# Altium PCB Camera_PCB.PcbDoc
Units mm, origin at the board's own origin, x right, y up, seen from the top; angles counter-clockwise.
Board outline 85 x 80 mm, 4 copper layers (Signal1, Power, Ground, Signal2), stack 1.782 mm thick; 120 components, 92 nets, 356 pads, 79 vias.
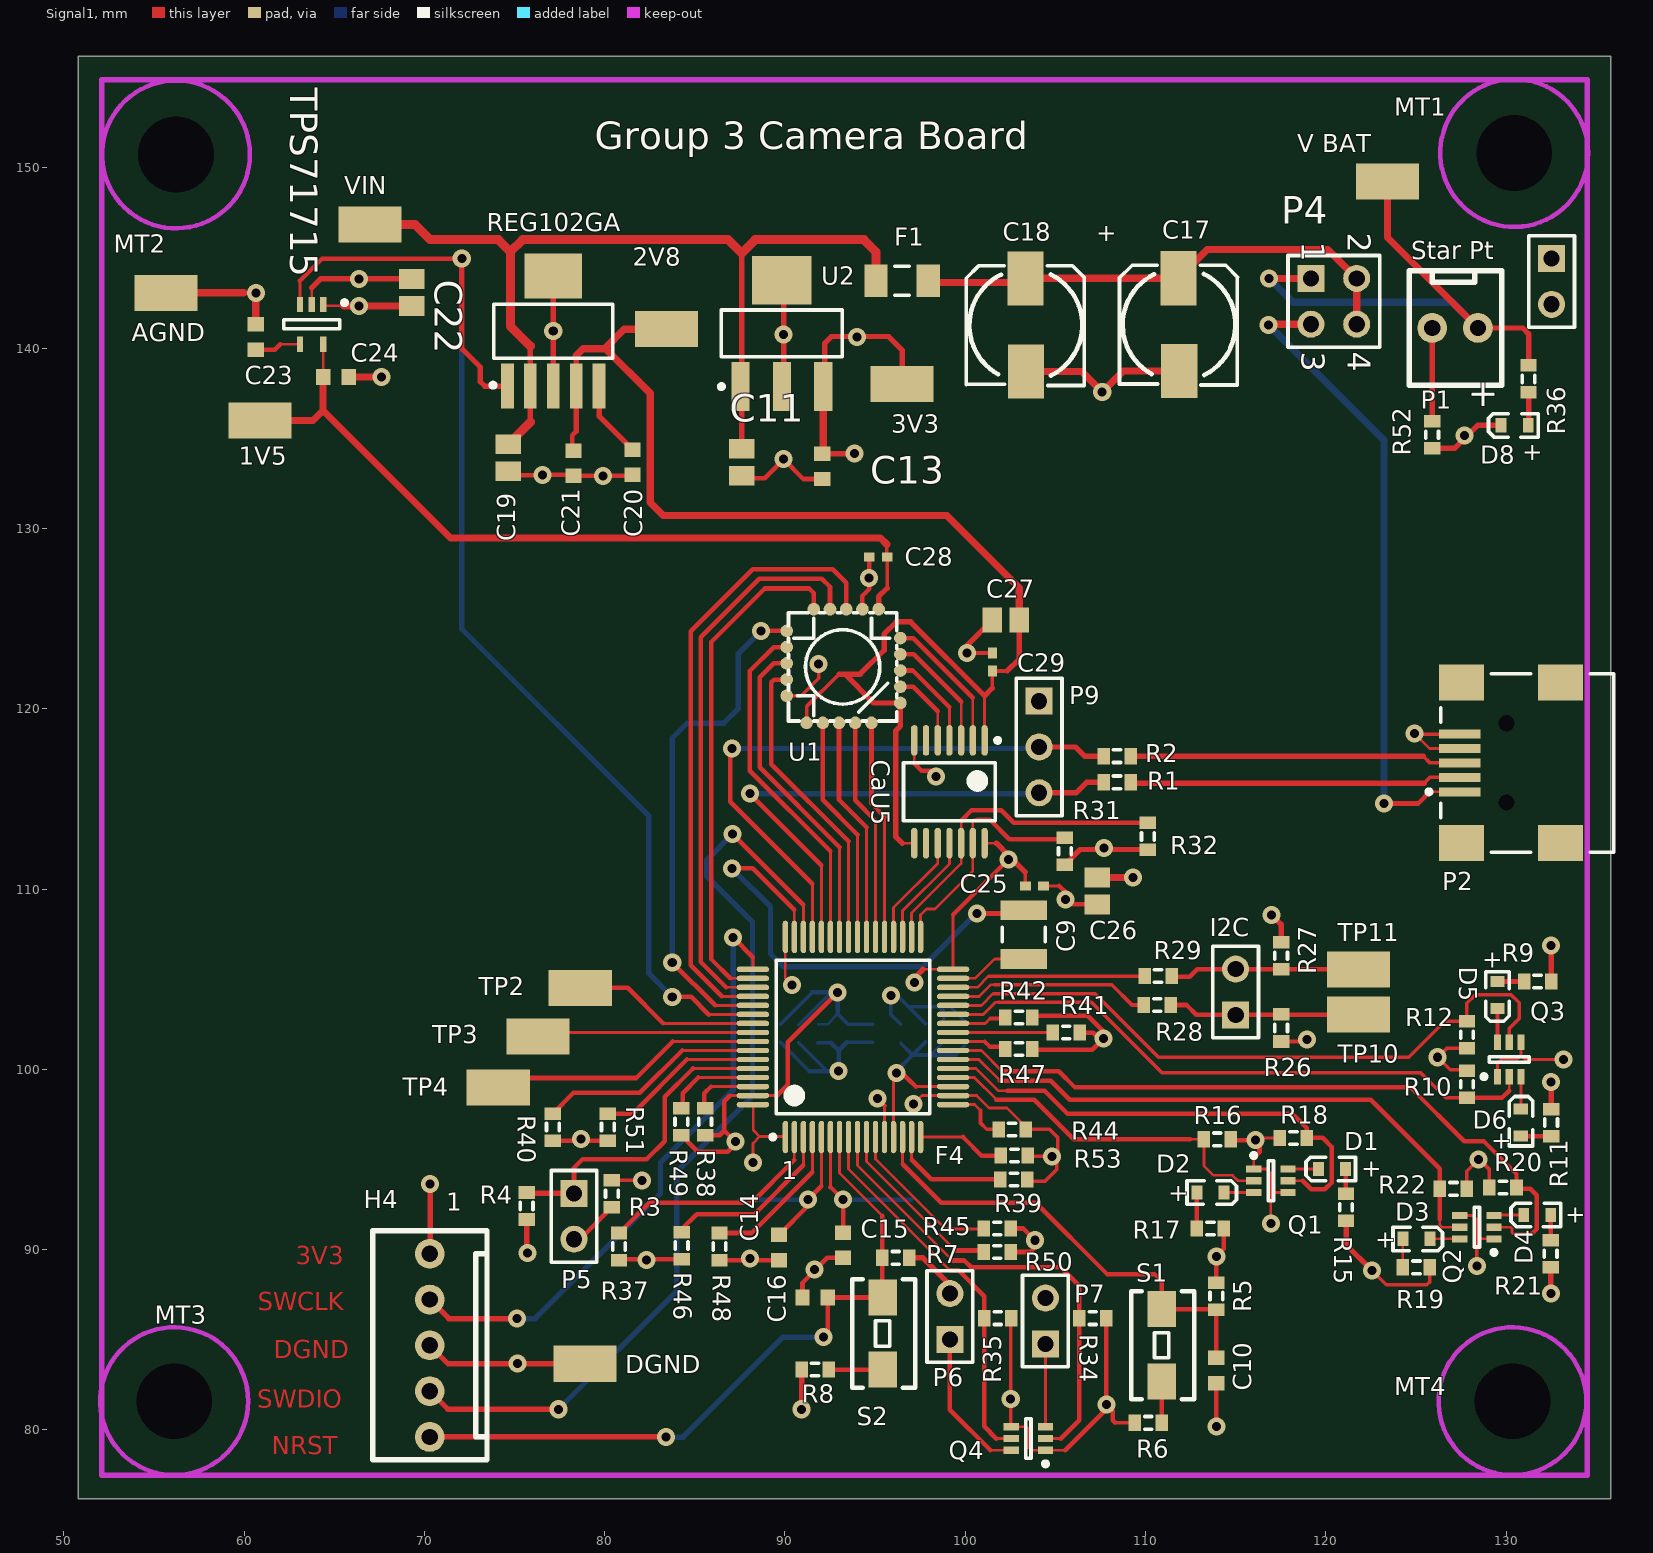
[diagram p0: Signal1 view]
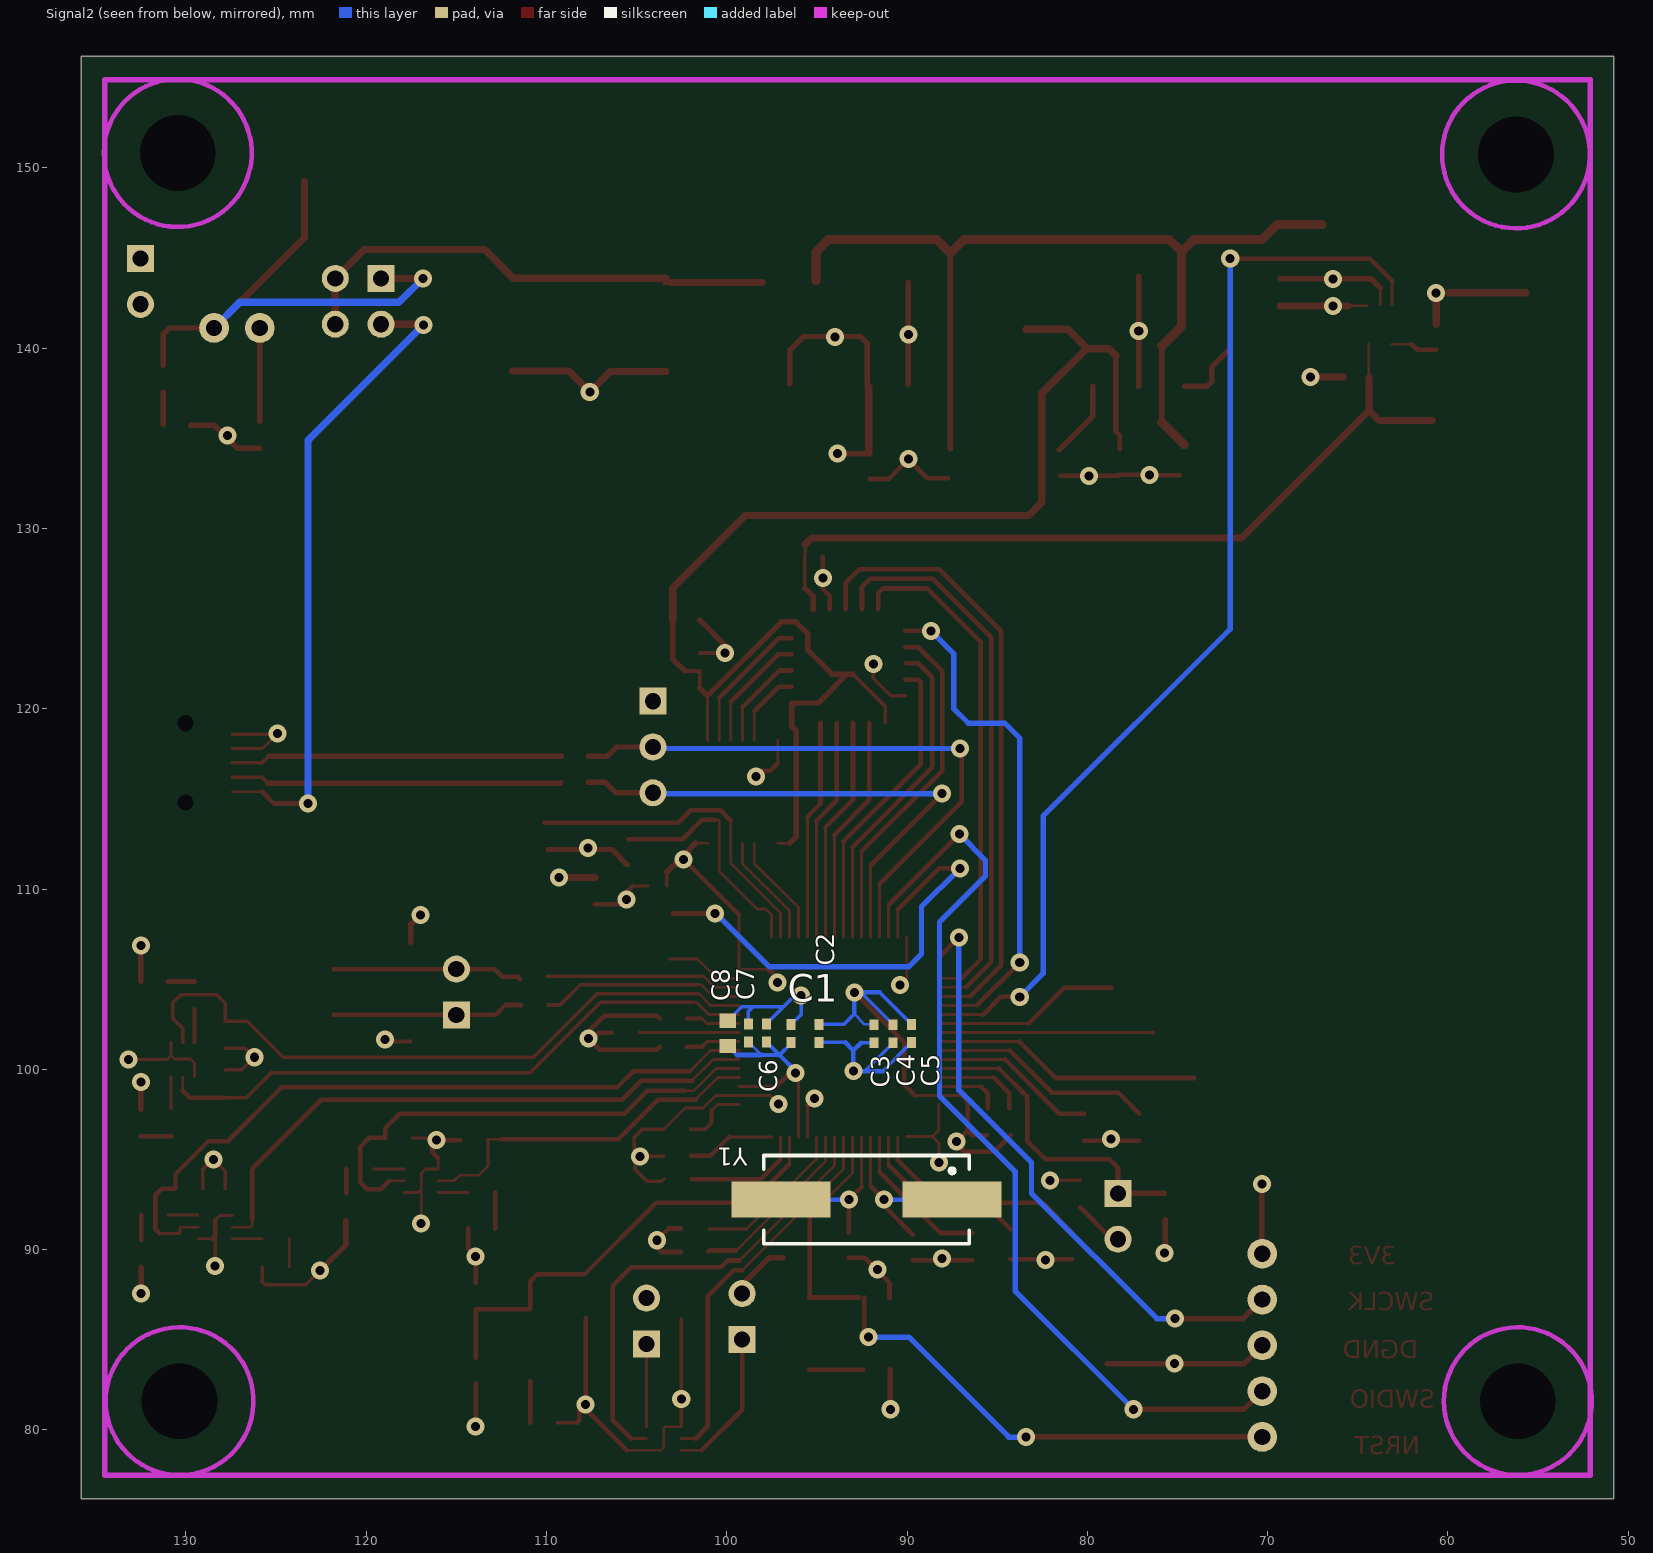
[diagram p1: Signal2 view, seen from below]
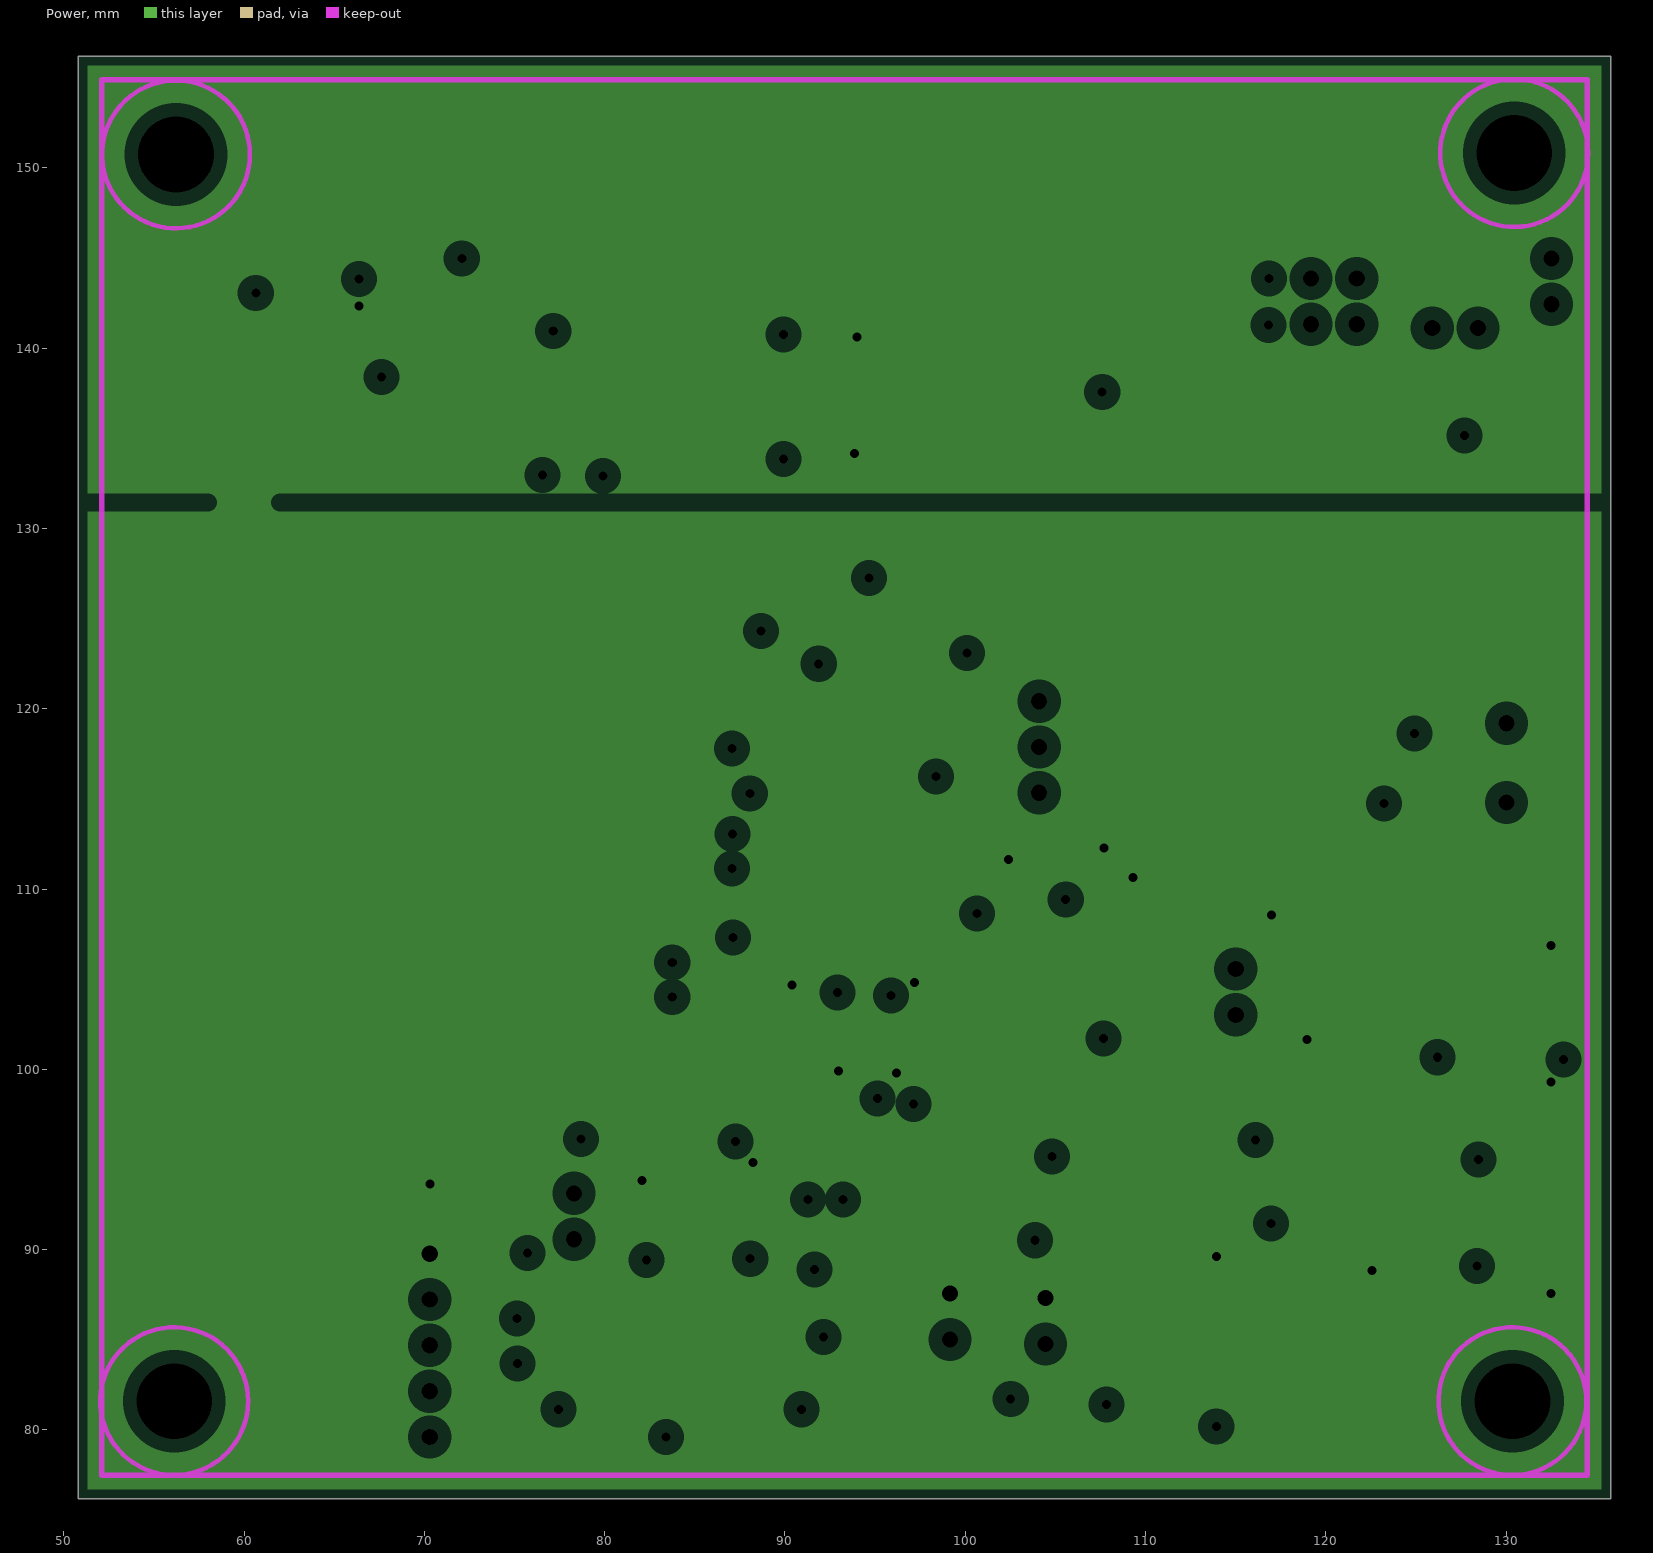
[diagram p2: Power, clearances drawn from the general rule]
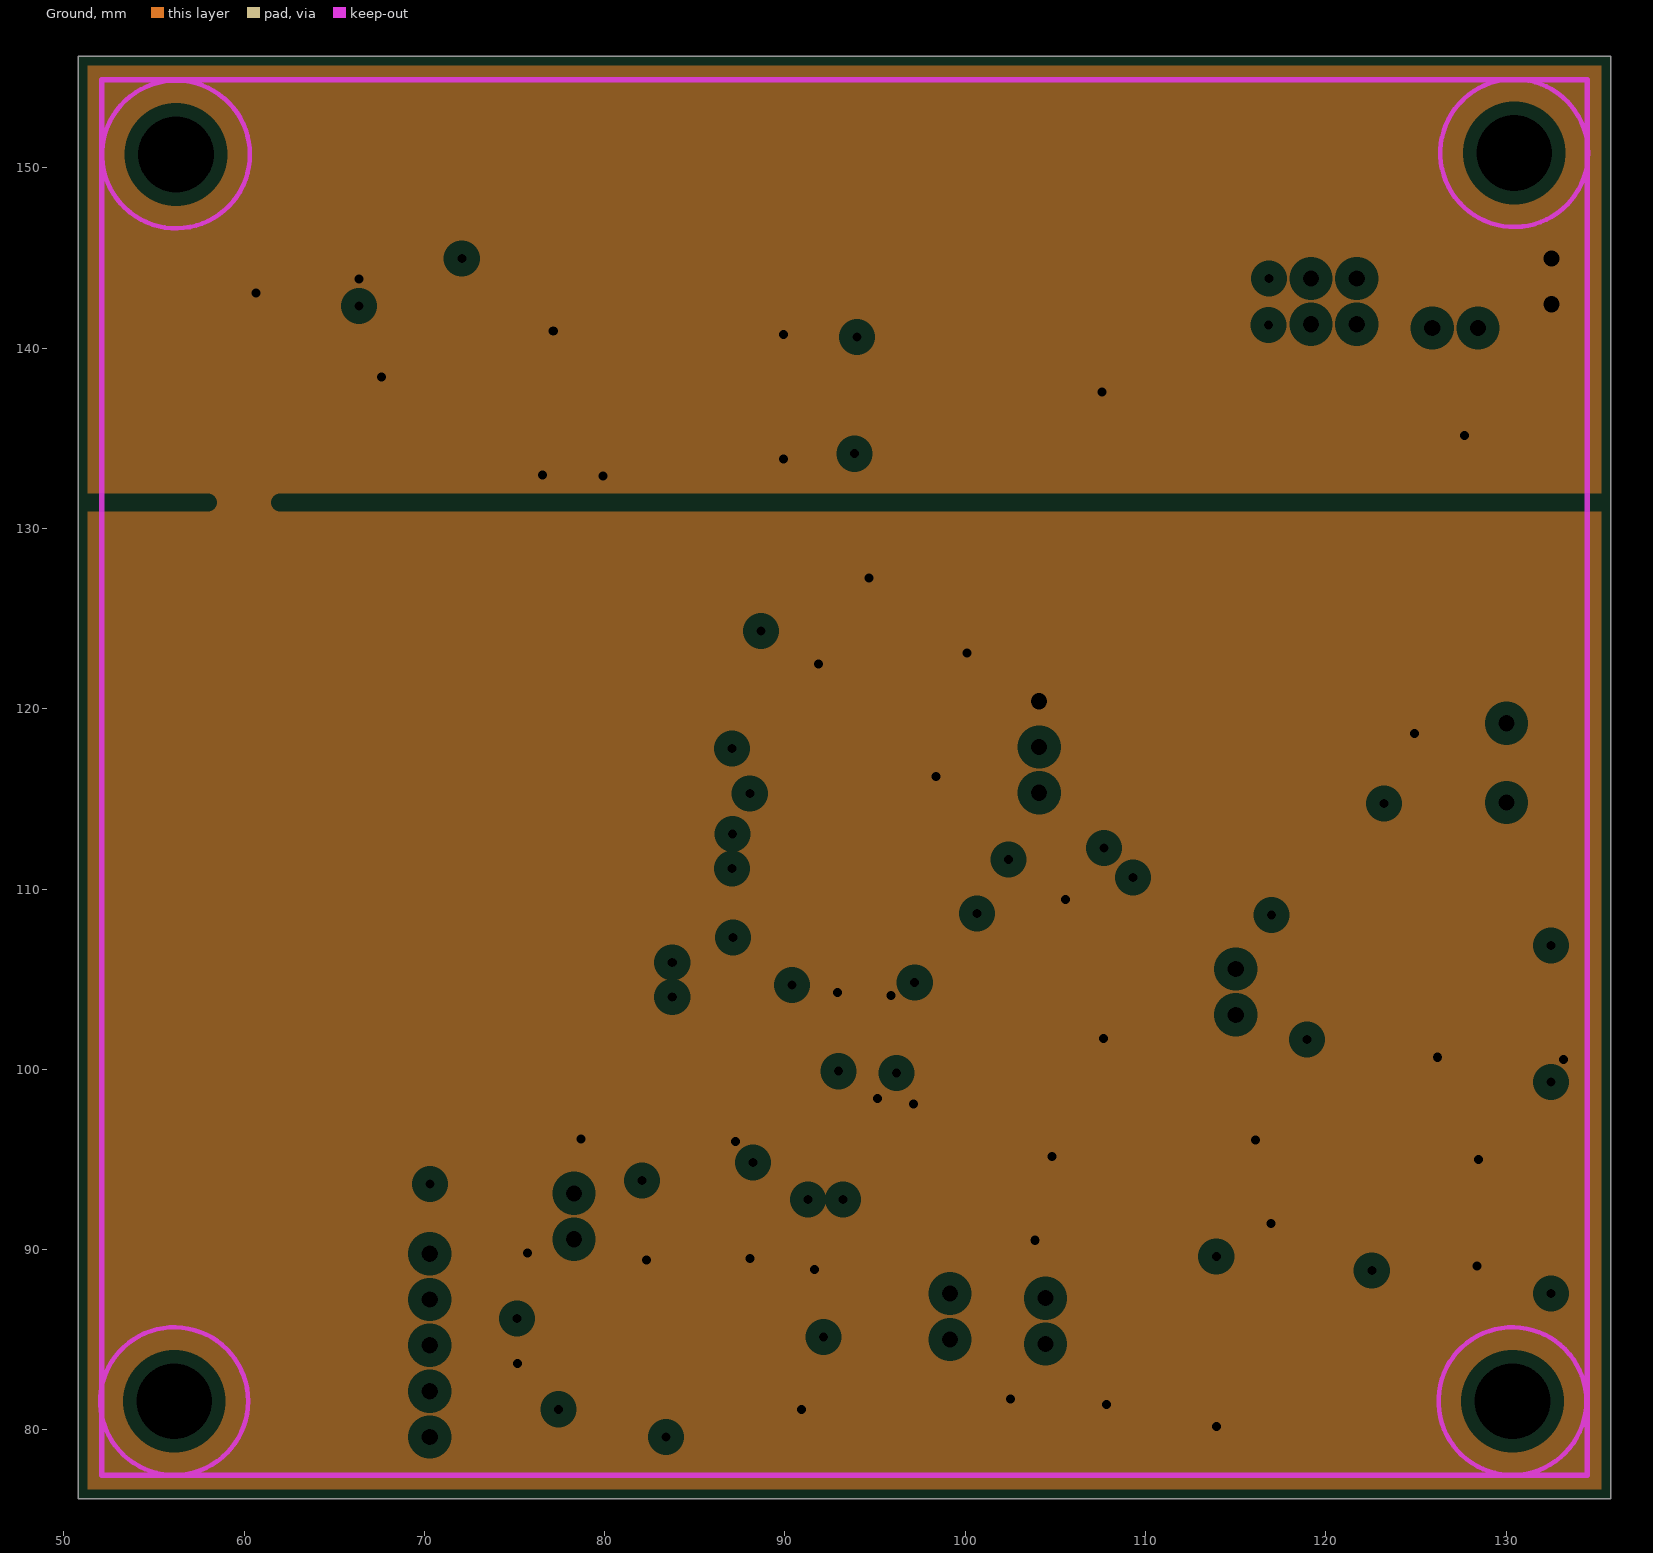
[diagram p3: Ground, clearances drawn from the general rule]

## Layer stack, top to bottom
Signal1: signal copper 0.0356
Dielectric: prepreg 0.32, FR-4, Dk 4.8
Power: plane copper 0.0356, net 3V3
Dielectric: core 1, FR-4, Dk 4.8
Ground: plane copper 0.0356, net AGND
Dielectric: prepreg 0.32, FR-4, Dk 4.8
Signal2: signal copper 0.0356

## Board outline
50.8,76.2 135.8,76.2 135.8,156.2 50.8,156.2

## Design rules (kind name [scope] priority, off if disabled: settings)
Clearance [All] p1: gap=0.15
Clearance Clearance_0.2mm [Width = 0.2 vs Width = 0.2] p2: gap=0.4
Clearance Clearance_0.25mm [Width = 0.25 vs Width = 0.25] p3: gap=0.5
Clearance Clearance_0.254mm [Width = 0.254 vs Width = 0.254] p4: gap=0.5
Clearance Clearance_0.3mm [Width = 0.3 vs Width = 0.3] p5: gap=0.6
Clearance Clearance_0.4 [Width = 0.4 vs Width = 0.4] p6: gap=0.8
Clearance Clearance_0.5mm [Width = 0.5 vs Width = 0.5] p7: gap=1
HoleSize [All] p1: absolutevalues=TRUE maxlimit=5 minlimit=0.3 maxpercent=80.000 minpercent=20.000
MinimumAnnularRing [All] p1: minimumring=0.1
MinimumSolderMaskSliver [All] p1: minsoldermaskwidth=0.2
NetAntennae [All] p1 off: netantennaetolerance=0
PasteMaskExpansion [All] p1: expansion=0.2
PlaneClearance [All] p1: clearance=0.75
PlaneConnect [All] p1: planeconnectstyle=Relief reliefexpansion=0.508 reliefentries=4 reliefconductorwidth=0.254 reliefairgap=0.254
PolygonConnect [All] p1: connectstyle=Relief reliefconductorwidth=0.254 reliefentries=4 polygonreliefangle="90 Angle" airgapwidth=0.254
RoutingCorners [All] p1: cornerstyle=45-Degree minsetback=0.254 maxsetback=0.254
RoutingVias [All] p1: holewidth=0.5 width=1 viastyle="Through Hole" minholewidth=0.4 minwidth=0.8 maxholewidth=0.7 maxwidth=1.4
SMDNeckDown [All] p1: percent=50.000
SMDToCorner [All] p1: distance=78740
SMDToPlane [All] p1: distance=1968504
SilkToSolderMaskClearance SilkscreenOverComponentPads [IsPad] p1: minsilkscreentomaskgap=0.254 clearancetoexposedcopper=TRUE
SolderMaskExpansion [All] p1: expansion=0.15
Width [All] p1: maxlimit=2 minlimit=0.15 preferedwidth=0.3 minimp=50.000000 maximp=50.000000 favimp=50.000000
20 further rules are at their usual default settings.

## Classes and differential pairs
component class Camera_Digital: C1 C2 C3 C4 C5 C6 C7 C8 C9 C10 C14 C15 C16 C25 C26 C27 C28 C29 CaU5 D1 D2 D3 D4 D5 D6 DGND F4 H4 I2C P2 P5 P6 P7 P9 PH Q1 Q2 Q3 Q4 R1 R2 R3 R4 R5 R6 R7 R8 R9 R10 R11 R12 R15 R16 R17 R18 R19 R20 R21 R22 R26 R27 R28 R29 R31 R32 R34 R35 R37 R38 R39 R40 R41 R42 R44 R45 R46 R47 R48 R49 R50 R51 R53 S1 S2 "Star Pt" TP2 TP3 TP4 TP10 TP11 U1 Y1
component class Camera_Analogue: 1V5 2V8 3V3 AGND C11 C13 C17 C18 C19 C20 C21 C22 C23 C24 D8 F1 MT1 MT2 MT3 MT4 P1 P4 R36 R52 REG102GA TPS71715 U2 "V BAT" VIN

## Components (designator, comment, footprint, x,y, rotation, side; value= is the part's Value field where it differs from the comment)
1V5 "TP" TEST_POINT_3.5X2MM 60.875,136 r0 top
2V8 "TP" TEST_POINT_3.5X2MM 83.425,141.075 r180 top
3V3 "TP" TEST_POINT_3.5X2MM 96.5,138.025 r0 top
AGND "TP" TEST_POINT_3.5X2MM 55.675,143.075 r0 top
C1 "4.7uF" CAPC1005L 96.425,102 r270 bottom
C2 "100nF" CAPC1005L 94.875,102 r270 bottom
C3 "100nF" CAPC1005L 91.825,101.975 r270 bottom
C4 "100nF" CAPC1005L 90.775,101.975 r270 bottom
C5 "100nF" CAPC1005L 89.75,102 r270 bottom
C6 "100nF" CAPC1005L 97.8,102.025 r270 bottom
C7 "100nF" CAPC1005L 98.8,102.025 r270 bottom
C8 "1uF" CAPC1608L 99.95,102 r270 bottom
C9 "2.2uF" 14-1210 103.25,107.475 r90 top
C10 "10nF" CAPC1608L 113.925,83.3 r90 top
C11 "2.2uF" CAPC2012L 87.6,133.675 r270 top
C13 "1uF" CAPC1608L 92.075,133.45 r90 top
C14 "10nF" CAPC1608L 89.675,90.125 r90 top
C15 "10nF" CAPC1608L 93.225,90.25 r90 top
C16 "10nF" CAPC1608L 91.675,87.35 r0 top
C17 "100uF/16V" NICH-1 111.85,141.3 r90 top
C18 "100uF/16V" NICH-1 103.35,141.275 r90 top
C19 "2.2uF" CAPC2012L 74.65,133.925 r270 top
C20 "10nF" CAPC1608L 81.55,133.675 r90 top
C21 "1uF" CAPC1608L 78.275,133.625 r90 top
C22 "2.2uF" CAPC2012L 69.3,143.1 r90 top
C23 "10nF" CAPC1608L 60.65,140.625 r270 top
C24 "1uF" CAPC1608L 65.1,138.4 r180 top
C25 "100nF" CAPC1005L 103.85,110.175 r180 top
C26 "1uF" CAPC2012L 107.325,109.9 r270 top
C27 "100nF" CAPC2012L 102.25,124.925 r180 top
C28 "100nF" CAPC1005L 95.175,128.425 r180 top
C29 "100nF" CAPC1005L 101.5,122.6 r90 top
CaU5 "TXB0104PWR" 14-TSSOP 99.125,115.4 r0 top
D1 "#NAME?" LED0.8X1.6 120.35,94.475 r180 top
D2 "#NAME?" LED0.8X1.6 113.6,93.175 r0 top
D3 "#NAME?" LED0.8X1.6 125.025,90.6 r0 top
D4 "#NAME?" LED0.8X1.6 131.725,91.925 r180 top
D5 "#NAME?" LED0.8X1.6 129.525,104.125 r270 top
D6 "#NAME?" LED0.8X1.6 130.825,97.05 r90 top
D8 "#NAME?" LED0.8X1.6 130.475,135.725 r180 top
DGND "TP" TEST_POINT_3.5X2MM 78.9,83.675 r0 top
F1 "1A" RESC3216N 96.5,143.75 r180 top
F4 "STM32F405RGT6" TQFP64_N 93.775,101.8 r90 top
H4 "5 Pin Molex KK Hdr" MOLEX_KK_5_HDR 70.3,89.775 r270 top
I2C "Header 2" HDR1X2 115,103.025 r90 top
MT1 "M4.2 NPTH" MNT-HOLE_4.2mm_NPTH 130.45,150.83 r0 top
MT2 "M4.2 NPTH" MNT-HOLE_4.2mm_NPTH 56.225,150.75 r0 top
MT3 "M4.2 NPTH" MNT-HOLE_4.2mm_NPTH 56.125,81.6 r0 top
MT4 "M4.2 NPTH" MNT-HOLE_4.2mm_NPTH 130.35,81.6 r0 top
P1 "2 Pin Molex KK HDR" MOLEX_KK_2_HDR 125.9,141.125 r0 top locked
P2 "JS_USB_MINI_B" USB/SM0.8-6H5 135.275,117 r0 top
P4 "Header 2X2" HDR2X2 119.175,143.875 r270 top
P5 "Header 2" HDR1X2 78.3,93.125 r270 top
P6 "Header 2" HDR1X2 99.15,85.025 r90 top
P7 "Header 2" HDR1X2 104.45,84.775 r90 top
P9 "Header 3" HDR1X3 104.1,120.425 r270 top
Q1 "DUAL-NFET" SOT363-6N 116.95,93.825 r0 top
Q2 "DUAL-NFET" SOT363-6N 128.375,91.25 r180 top
Q3 "DUAL-NFET" SOT363-6N 130.175,100.55 r90 top
Q4 "DUAL-NFET" SOT363-6N 103.5,79.525 r180 top
R1 "22R" RESC1608L 108.425,115.925 r0 top
R2 "22R" RESC1608L 108.425,117.375 r0 top
R3 "220R" RESC1608L 80.4,93.1 r90 top
R4 "22K" RESC1608L 75.675,92.425 r90 top
R5 "10K" RESC1608L 113.925,87.425 r90 top
R6 "470R" RESC1608L 110.15,80.4 r180 top
R7 "10K" RESC1608L 96.15,89.55 r0 top
R8 "470R" RESC1608L 91.675,83.35 r180 top
R9 "110R" RESC1608L 131.75,104.875 r0 top
R10 "1M" RESC1608L 127.825,99.175 r270 top
R11 "110R" RESC1608L 132.5,97.05 r90 top
R12 "1M" RESC1608L 127.825,101.925 r90 top
R15 "39R" RESC1608L 121.125,92.35 r270 top
R16 "1M" RESC1608L 113.975,96.125 r180 top
R17 "39R" RESC1608L 113.6,91.175 r0 top
R18 "1M" RESC1608L 118.2,96.2 r0 top
R19 "39R" RESC1608L 125.025,89.025 r0 top
R20 "1M" RESC1608L 129.825,93.45 r0 top
R21 "39R" RESC1608L 132.475,89.775 r270 top
R22 "1M" RESC1608L 127.075,93.375 r180 top
R26 "4K7" RESC1608L 117.525,102.3 r270 top
R27 "4K7" RESC1608L 117.525,106.3 r270 top
R28 "100R" RESC1608L 110.65,103.575 r0 top
R29 "100R" RESC1608L 110.7,105.175 r0 top
R31 "4K7" RESC1608L 105.525,112.1 r270 top
R32 "4K7" RESC1608L 110.125,112.925 r90 top
R34 "1M" RESC1608L 107.075,86.2 r180 top
R35 "1M" RESC1608L 101.8,86.2 r180 top
R36 "160R" RESC1608L 131.25,138.3 r90 top
R37 "1K" RESC1608L 80.8,90.175 r270 top
R38 "1K" RESC1608L 85.575,97.1 r270 top
R39 "1K" RESC1608L 102.7,93.9 r0 top
R40 "1K" RESC1608L 77.125,96.8 r270 top
R41 "1K" RESC1608L 105.6,102.05 r0 top
R42 "1K" RESC1608L 102.975,102.875 r0 top
R44 "1K" RESC1608L 102.6,96.675 r0 top
R45 "1K" RESC1608L 101.775,91.175 r0 top
R46 "1K" RESC1608L 84.275,90.225 r270 top
R47 "1K" RESC1608L 102.975,101.125 r0 top
R48 "1K" RESC1608L 86.375,90.175 r270 top
R49 "1K" RESC1608L 84.25,97.1 r270 top
R50 "1K" RESC1608L 101.775,89.875 r0 top
R51 "1K" RESC1608L 80.175,96.8 r270 top
R52 "0R" RESC1608L 125.9,135.2 r90 top
R53 "1K" RESC1608L 102.725,95.225 r0 top
REG102GA "REG102GA" SOT223-6M 77.15,140.95 r90 top locked
S1 "EVQPNF05M" EVQPNF05M 110.9,84.7 r270 top
S2 "EVQPNF05M" EVQPNF05M 95.425,85.35 r270 top
"Star Pt" "Header 2" HDR1X2 132.525,144.975 r270 top
TP2 "TP" TEST_POINT_3.5X2MM 78.65,104.525 r0 top
TP3 "TP" TEST_POINT_3.5X2MM 76.3,101.825 r0 top
TP4 "TP" TEST_POINT_3.5X2MM 74.1,99 r0 top
TP10 "TP" TEST_POINT_3.5X2MM 121.825,103.05 r180 top
TP11 "TP" TEST_POINT_3.5X2MM 121.825,105.55 r180 top
TPS71715 "TPS71715" SC-70-5 63.75,141.325 r270 top
U1 "TCM8230MD" TCM8230MD 96.2,119.325 r180 top
U2 "LT1963" SOT223-4M 89.825,140.825 r90 top
"V BAT" "TP" TEST_POINT_3.5X2MM 123.425,149.25 r180 top
VIN "TP" TEST_POINT_3.5X2MM 66.975,146.875 r0 top
Y1 "8MHz" HC49/4h_SMX 92.25,92.775 r0 bottom

## Footprints (in the part's own frame and the unit in brackets; to place one, negate y for a bottom-side part, rotate by r counter-clockwise, add the part's x,y. Pads: shape width x height; smd on the part's side, far side on the other; paste and mask are expansions set on the pad)
14-1210 [mm] "Chip Resistor, Body 3.2x2.5mm, IPC High Density"
  rect 1.1x2.6 smd: 1(-1.35,0) 2(1.35,0)
  silkscreen extent -0.4,-1.2 0.4,1.2, body extent -1.68,-1.32 1.68,1.32, height 0.9
14-TSSOP [mm] "14-TSSOP"
  oval 0.35x1.7 smd mask+0: 1(1.95,2.85) 2(1.3,2.85) 3(0.65,2.85) 4(0,2.85) 5(-0.65,2.85) 6(-1.3,2.85) 7(-1.95,2.85) 8(-1.95,-2.85) 9(-1.3,-2.85) 10(-0.65,-2.85) 11(0,-2.85) 12(0.65,-2.85) 13(1.3,-2.85) 14(1.95,-2.85)
  silkscreen extent -2.55,-1.6 2.8,2.97, body extent -2.55,-2.25 2.55,2.25, height 1.2
CAPC1005L [mm] "Chip Capacitor, Body 1.0x0.5mm, IPC High Density"
  rect 0.6x0.5 smd: 1(-0.5,0) 2(0.5,0)
  body extent -0.55,-0.3 0.55,0.3, height 0.6
CAPC1608L [mm] "Chip Capacitor, Body 1.6x0.8mm, IPC High Density"
  rect 0.8x0.9 smd: 1(-0.7,0) 2(0.7,0)
  body extent -0.87,-0.48 0.87,0.48, height 0.85
CAPC2012L [mm] "Chip Capacitor, Body 2.0x1.3mm, IPC High Density"
  rect 1.1x1.4 smd: 1(-0.75,0) 2(0.75,0)
  body extent -1.1,-0.72 1.1,0.72, height 1.1
EVQPNF05M [mm] "Panansonic light touch SMD push button switch"
  rect 2x1.6 smd: 1(-2,0) 2(2,0)
  silkscreen extent -3,-1.7 3,1.8, body extent -3,-1.7 3,1.8, height 5
HC49/4h_SMX [mm] "Quartz Crystal, SM; Body 13.4 (inc. leads) x 4.9 mm (LxW max)"
  rect 5.5x2 smd: 1(-4.75,0) 2(4.75,0)
  silkscreen extent -5.7,-2.45 5.7,2.45, body extent -5.61,-2.35 5.56,2.35, height 4
HDR1X2 [mm] "Connector; Header; 2 Position"
  rect 1.5x1.5 hole 0.9: 1(0,0)
  round 1.5 hole 0.9: 2(2.54,0)
  silkscreen extent -1.27,-1.27 3.81,1.27
HDR1X3 [mm] "Connector; Header; 3 Position"
  rect 1.5x1.5 hole 0.9: 1(0,0)
  round 1.5 hole 0.9: 2(2.54,0) 3(5.08,0)
  silkscreen extent -1.27,-1.27 6.35,1.27
HDR2X2 [mm] "Connector; Header; 2x2 Position"
  rect 1.5x1.5 hole 0.9: 1(0,0)
  round 1.5 hole 0.9: 2(0,2.54) 3(2.54,0) 4(2.54,2.54)
  silkscreen extent -1.27,-1.27 3.81,3.81
LED0.8X1.6 [mm] "LED 0603"
  rect 0.6x0.8 smd: 1(-0.75,0) 2(0.75,0)
  silkscreen extent -1.3,-0.65 1.45,0.65
MNT-HOLE_4.2mm_NPTH [mm] "Mounting Hole 4.2mm non plated"
  round 0 hole 4.2 unplated: 1(0,0)
  Keep-Out Layer circle w0.254: c0,0 r4.1
MOLEX_KK_2_HDR [mil] "MOLEX_KK_2_HDR"
  round 65 hole 35.43: 1(0,0) 2(100,0)
  silkscreen extent -50,-125 152,125, body extent -44,-121 146,119, height 630
MOLEX_KK_5_HDR [mil] "MOLEX_KK_5_HDR"
  round 65 hole 35.43: 1(0,0) 2(100,0) 3(200,0) 4(300,0) 5(400,0)
  silkscreen extent -50,-125 450,125, body extent -44,-118 444,118, height 630
NICH-1 [mm] "Electrolytic capacitor"
  rect 3x2 smd: 1(-2.561,-0.022) 2(2.584,0.011)
  silkscreen extent -3.34,-3.25 3.3,3.3, body extent -3.2,-3.21 3.2,3.2, height 5.3
RESC1608L [mm] "Chip Resistor, Body 1.6x0.8mm, IPC High Density"
  rect 0.7x0.9 smd: 1(-0.75,0) 2(0.75,0)
  silkscreen extent -0.2,-0.35 0.2,0.35, body extent -0.85,-0.48 0.85,0.48, height 0.9
RESC3216N [mm] "Chip Resistor, Body 3.2x1.6mm, IPC Medium Density"
  rect 1.3x1.8 smd: 1(-1.45,0) 2(1.45,0)
  silkscreen extent -0.4,-0.8 0.4,0.8, body extent -1.68,-0.87 1.68,0.87, height 0.71
SC-70-5 [mm] "SOT23, 5-Leads, Body 2.9x1.6mm, Pitch 0.95mm, Lead Span 2.8mm, IPC Medium Density"
  rect 0.85x0.35 smd: 1(-1.1,0.65) 2(-1.1,0) 3(-1.1,-0.65) 4(1.1,0.65) 5(1.1,-0.65)
  silkscreen extent -1.32,-1.55 0.25,1.95, body extent -0.76,-1.52 0.76,1.52, height 1.19
SOT223-4M [mm] "SOT223, 4-Leads, Body 6.5x3.5mm, Pitch 2.3mm, Lead Span 7mm, IPC Low Density"
  rect 2.7x1 smd: 1(-2.95,2.3) 2(-2.95,0) 3(-2.95,-2.3)
  rect 2.7x3.3 smd: 4(2.95,0)
  silkscreen extent -3.07,-3.35 1.3,3.47, body extent -1.85,-3.35 1.85,3.35, height 1.8
SOT223-6M [mm] "SOT223, 6-Leads, Body 6.5x3.5mm, Pitch 1.27mm, Lead Span 7mm, IPC Low Density"
  rect 2.5x0.7 smd: 1(-3.05,2.54) 2(-3.05,1.27) 3(-3.05,0) 4(-3.05,-1.27) 5(-3.05,-2.54)
  rect 2.5x3.2 smd: 6(3.05,0)
  silkscreen extent -3.12,-3.3 1.5,3.46, body extent -1.77,-3.27 1.77,3.27, height 1.8
SOT363-6N [mm] "SOT363, 6-Leads, Body 2x1.3mm, Pitch 0.65mm, Lead Span 2.1mm, IPC Medium Density"
  rect 0.85x0.4 smd: 1(-0.95,0.65) 2(-0.95,0) 3(-0.95,-0.65) 4(0.95,-0.65) 5(0.95,0) 6(0.95,0.65)
  silkscreen extent -1.07,-1.1 0.15,1.52, body extent -0.7,-1.1 0.7,1.1, height 1
TCM8230MD [mm] "Toshiba VGA Camera Module"
  round 0.7 smd mask+0: 1(-0.2,-1) 2(-0.2,-1.9) 3(-0.2,-2.8) 4(-0.2,-3.7) 5(-0.2,-4.6) 6(1,-6.2) 7(1.9,-6.2) 8(2.8,-6.2) 9(3.7,-6.2) 10(4.6,-6.2) 11(6.1,-5) 12(6.1,-4.1) 13(6.1,-3.2) 14(6.1,-2.3) 15(6.1,-1.4) 16(5,0.1) 17(4.1,0.1) 18(3.2,0.1) 19(2.3,0.1) 20(1.4,0.1)
  silkscreen extent 0,-6 6,0, body extent 0,-6 6,0, height 4.5
TEST_POINT_3.5X2MM [mm] "Test Point Pad"
  rect 3.5x2 smd: 1(0,0)
  body extent -1.75,-1.01 1.75,1, height 2
TQFP64_N [mm] "Thin QFP, 64-Leads, Body 10x10mm, Pitch 0.5mm, IPC Medium Density"
  oval 1.8x0.3 smd: 1(-5.55,3.75) 2(-5.55,3.25) 3(-5.55,2.75) 4(-5.55,2.25) 5(-5.55,1.75) 6(-5.55,1.25) 7(-5.55,0.75) 8(-5.55,0.25) 9(-5.55,-0.25) 10(-5.55,-0.75) 11(-5.55,-1.25) 12(-5.55,-1.75) 13(-5.55,-2.25) 14(-5.55,-2.75) 15(-5.55,-3.25) 16(-5.55,-3.75) 33(5.55,-3.75) 34(5.55,-3.25) 35(5.55,-2.75) 36(5.55,-2.25) 37(5.55,-1.75) 38(5.55,-1.25) 39(5.55,-0.75) 40(5.55,-0.25) 41(5.55,0.25) 42(5.55,0.75) 43(5.55,1.25) 44(5.55,1.75) 45(5.55,2.25) 46(5.55,2.75) 47(5.55,3.25) 48(5.55,3.75)
  oval 0.3x1.8 smd: 17(-3.75,-5.55) 18(-3.25,-5.55) 19(-2.75,-5.55) 20(-2.25,-5.55) 21(-1.75,-5.55) 22(-1.25,-5.55) 23(-0.75,-5.55) 24(-0.25,-5.55) 25(0.25,-5.55) 26(0.75,-5.55) 27(1.25,-5.55) 28(1.75,-5.55) 29(2.25,-5.55) 30(2.75,-5.55) 31(3.25,-5.55) 32(3.75,-5.55) 49(3.75,5.55) 50(3.25,5.55) 51(2.75,5.55) 52(2.25,5.55) 53(1.75,5.55) 54(1.25,5.55) 55(0.75,5.55) 56(0.25,5.55) 57(-0.25,5.55) 58(-0.75,5.55) 59(-1.25,5.55) 60(-1.75,5.55) 61(-2.25,5.55) 62(-2.75,5.55) 63(-3.25,5.55) 64(-3.75,5.55)
  silkscreen extent -5.67,-4.25 4.25,4.57, body extent -5,-5 5,5, height 1.6
USB/SM0.8-6H5 [mm] "Connector; USB2.0, Type B, SM; 5 Position; Right Angle"
  rect 2.3x0.5 smd: 1(-7.85,-1.6) 2(-7.85,-0.8) 3(-7.85,0) 4(-7.85,0.8) 5(-7.85,1.6)
  rect 2.5x2 smd: 6(-7.75,4.45) 7(-2.25,4.45) 8(-7.75,-4.45) 9(-2.25,-4.45)
  round 0.6 hole 0.9 unplated: MH1(-5.25,2.2) MH2(-5.25,-2.2)
  silkscreen extent -9.67,-4.95 0.7,4.95, body extent -8.9,-4.95 0.7,4.95, height 3.9

## Part data
1V5 2V8 3V3 AGND DGND TP2 TP3 TP4 TP10 TP11 "V BAT" VIN: library part TP_TESTPOINT, "Test-Point"
C1 C2 C3 C4 C5 C6 C7 C25 C28 C29: library part CC_100nF_0402, "CAP CER 100nF X7R +-10% 16V 0402"
C8 C13 C21 C24: library part CC_1uF_0603, "CAP CER 1uF Y5V -20% +80% 16V 0603"
C9 C11 C19 C22 C26 C27: library part CC_2.2uF_0805, "CAP CER 2.2uF Y5V -20% +80% 25V 0805"
C10 C14 C15 C16 C20 C23: library part CC_10nF_0603, "CAP CER 10nF X7R +-10% 50V 0603"
C17 C18: library part CA_100uF_16V_SMD, "Nichcon WX series  SMT Aluminium Electrolytic Cap"
CaU5: library part SG_TXB0104PWR, "VOLT-LEVEL TRANSLATOR 14TSSOP"
D1 D2 D3 D4: library part DL_TLMS1100, "LED Red 0603"
D5 D8: library part DL_TLMG1100, "LED Green 0603"
D6: library part DL_TLMY1100, "LED Yellow 0603"
F1: library part FS_Fuse_1.0A_SMD_1206, "Fuse 1.0A Very Fast Acting 1206"
F4: "ARM Cortex-M4 32b MCU+FPU, 210DMIP, 1024 kB Flash, 192+4 kB RAM, 51 I/Os, 64-pin LQFP, -40 to +85°C, Tray"
H4: library part JA_MOLEX_KK_5POS, "CONN HEADER 5POS 2.54mm VERT_Thru Hole"
I2C P5 P6 P7 "Star Pt": "Header, 2-Pin"
MT1 MT2 MT3 MT4: library part MC_M4.2_HOLE_NPT, "Fixing M4.2 Mount Hole NPTH"
P1: library part JA_MOLEX_KK_2POS, "CONN HEADER 2POS 2.54mm VERT_Thru Hole"
P2: library part JS_USB_MINI_B_SMT, "USB 2.0, Right Angle, SMT, B Type, Receptacle, 5 Position,"
P4: "Header, 2-Pin, Dual row"
P9: "Header, 3-Pin"
R1 R2: library part RS_22R, "RES 22 OHM 1/10W 5% 0603 SMD"
R3: library part RS_220R, "RES 220 OHM 1/10W 5% 0603 SMD"
R4: library part RS_22K, "RES 22.0K OHM 1/10W 5% 0603 SMD"
R5 R7: library part RS_10K, "RES 10.0K OHM 1/10W 5% 0603 SMD"
R6 R8: library part RS_470R, "RES 470 OHM 1/10W 5% 0603 SMD"
R9 R11 R15 R17 R19 R21: library part RS_110R, "RES 110 OHM 1/10W 5% 0603 SMD"
R10 R12 R16 R18 R20 R22 R34 R35: library part RS_1M, "RES 1.0M OHM 1/10W 5% 0603 SMD"
R26 R27 R31 R32: library part RS_4K7, "RES 4.7K OHM 1/10W 5% 0603 SMD"
R28 R29: library part RS_100R, "RES 100 OHM 1/10W 5% 0603 SMD"
R36: library part RS_160R, "RES 160 OHM 1/10W 5% 0603 SMD"
R37 R38 R39 R40 R41 R42 R44 R45 R46 R47 R48 R49 R50 R51 R53: library part RS_1K, "RES 1.0K OHM 1/10W 5% 0603 SMD"
R52: library part RS_0R0, "RES 0.0 OHM 1/10W 5% 0603 SMD"
REG102GA: library part TSP796xx, "ULTRALOW-NOISE, HIGH PSRR, FAST, RF, 1A  LOW-DROPOUT LINEAR REGULATORS"
S1 S2: library part WS_EVQPNF05M, "Panasonic 6 x 3.5mm SMD Light Touch Switch Type"
TPS71715: "ULTRALOW-NOISE, HIGH PSRR, FAST, RF, 1A  LOW-DROPOUT LINEAR REGULATORS"
U1: "Toshiba I2C Camera"
Y1: library part XT_8MHz_HC49/4H, "CRYSTAL 8.00 MHZ 18PF SMD"

## Via types
v1: diameter 1, hole 0.5, Signal1 to Signal2, 65 vias
v2: diameter 1, hole 0.5, Signal1 to Signal2, tented top, 14 vias

## Nets (pads, with @x,y where several pads share a name; then routed paths per layer and width w, separated by ;. In a path a pad name is that pad's centre, name@x,y a point inside that pad or via, vN(x,y) a via of type N, cw(c..) or ccw(c..) an arc to the next point about the centre after c; other vN are vias at no path point)
1V5: 1V5.1 C24.2 C28.1 TPS71715.4 U1.6 | length 45.4
  Signal1 w0.15: C24.2 TPS71715.4
  Signal1 w0.2: C28.1@95.65,128.6 95.65,129.125 ; 95.675,126.7 C28.1
  Signal1 w0.3: U1.6 95.2,126.225 95.675,126.7
  Signal1 w0.4: 1V5.1 63.825,136 64.375,136.55 ; C24.2@64.375,138.375 64.375,136.55 ; 95.65,129.125 95.3,129.475 71.45,129.475 64.375,136.55
2V8: 2V8.1 C21.2 C27.1 C29.1 CaU5.1 CaU5.8 REG102GA.4 U1.1 U1.16 | length 80
  Signal1 w0.15: 96.5,112.55 CaU5.8 ; CaU5.1 101.075,120.725
  Signal1 w0.2: U1.16 91.2,120.125 93,121.925 ; 101.5,121.15 C29.1 102.325,122.1
  Signal1 w0.254: C21.2@78.2,134.4 78.2,135.175 78.42,135.395
  Signal1 w0.3: 78.42,135.395 REG102GA.4 78.42,139.595 ; 93,121.925 93.325,121.925 ; 96.5,112.55 96.15,112.9 96.15,118.8 96.4,119.05 U1.1 94.925,120.325 93.325,121.925 ; 101.075,120.725 101.5,121.15 ; 101.075,120.726 96.976,124.825 96.175,124.825 95.5,124.15 95.5,123.25 94.175,121.925 93.325,121.925 ; 102.325,122.1 103,122.775 C27.1
  Signal1 w0.4: 78.42,139.595 78.8,139.975 80,139.975 81.075,141.05 2V8.1@83.4,141.05 ; 80.025,140 82.525,137.5 82.525,131.45 83.25,130.725 98.975,130.725 103,126.7 C27.1
3V3: 3V3.1 C1.2 C2.2 C3.2 C4.2 C5.2 C6.2 C7.2 C8.2 C13.2 C22.1 C25.2 C26.1 CaU5.14 F4.1 F4.13 F4.19 F4.32 F4.48 F4.64 H4.1 P6.2 P7.2 R3.2 R5.2 R7.2 R9.2 R11.2 R15.2 R17.2 R19.2 R21.2 R26.2 R27.1 R31.2 R32.1 TPS71715.1 U2.3 | length 100
  Signal1 w0.15: TPS71715.1@64.475,142.35 65.525,142.35 ; v2@88.225,94.75 v2(88.225,94.825) 88.225,95.9 88.6,96.275 ; F4.64@88.25,98.05 88.25,96.625 88.6,96.275 ; F4.1@90.025,96.275 88.6,96.275 ; F4.48 90.025,105.05 v2(90.4,104.675) ; F4.13 96.025,99.625 v2@96.225,99.825 ; v2(97.2,104.825) v2@97.2,105.1 ; 97.25,99.05 F4.19 ; 97.65,105.55 F4.32 99.325,108.575 ; CaU5.14 101.725,112.55 ; v1@118.85,101.55 v1(118.95,101.65)
  Signal1 w0.2: R3.2 v1(82.075,93.85) ; C25.2@103.325,110.2 103.325,110.95 ; R26.2 v1@118.85,101.55 ; v1(122.55,88.85) 123.35,88.05 125.525,88.05 ; 125.6,88.05 125.775,88.225 R19.2
  Signal1 w0.25: v2@96.225,99.825 96.475,99.825 96.875,99.425
  Signal1 w0.254: 96.875,99.425 97.25,99.05 ; P6.2 P6.2@99.15,88.05 ; 99.325,108.575 v1(102.4,111.65) ; R5.2 v1(113.925,89.625) 114.35,90.05 R17.2
  Signal1 w0.3: H4.1@70.325,89.8 v1(70.325,93.65) ; C13.2@92.125,134.15 v1(93.85,134.15) ; U2.3@92.2,137.95 92.2,140.275 92.575,140.65 95.75,140.65 96.5,139.9 3V3.1 ; R7.2 97.65,89.55 P6.2@99.15,88.05 ; v2@97.2,105.1 97.65,105.55 ; 101.725,112.55 v1@102.4,111.875 ; v1@102.625,111.65 103.325,110.95 ; R31.2 106.375,112.2 R32.1@109.9,112.2 ; v1(117,108.575) 117.525,108.05 R27.1 ; R15.2 121.125,90.275 v1(122.55,88.85) ; v1@132.475,87.6 R21.2 ; R11.2 v1(132.5,99.3) ; R9.2 v1(132.5,106.875)
  Signal1 w0.4: 65.525,142.35 v1(66.387,142.35) 67.25,142.35 C22.1 ; C13.2@92.125,134.2 U2.3 ; C26.1 v1(109.3,110.65)
  Signal2 w0.15: 98.075,100.8 C7.2
  Signal2 w0.2: C5.2 91.35,99.9 ; C4.2 92.35,99.9 ; C3.2 92.55,101.475 ; 93.425,101.5 C2.2 ; C1.2@96.425,101.45 97.075,100.8 ; C6.2 97.075,100.8 ; 98.075,100.8 97.075,100.8 ; 99.45,100.8 C8.2
  Signal2 w0.254: 91.35,99.9 92.35,99.9 v2(92.975,99.9) 92.975,101.05 ; 92.55,101.475 92.975,101.05 ; 93.425,101.5 92.975,101.05 ; v2@96.175,99.9 97.075,100.8 ; 98.075,100.8 99.45,100.8
  other v1: 132.5,87.575 107.7,112.275 94,140.625
  other v2: 96.2,99.8
AGND: "Star Pt.1" "Star Pt.2" AGND.1 C1.1 C2.1 C3.1 C4.1 C5.1 C6.1 C7.1 C8.1 C10.1 C11.2 C13.1 C14.1 C15.1 C16.1 C17.1 C18.1 C19.2 C20.1 C21.1 C22.2 C23.1 C24.1 C25.1 C26.2 C27.2 C28.2 C29.2 CaU5.7 D8.2 DGND.1 F4.12 F4.18 F4.63 H4.3 P2.4 P2.5 P9.1 Q1.1 Q1.4 Q2.1 Q2.4 Q3.1 Q3.4 Q4.1 Q4.4 R4.1 R6.2 R8.2 R10.1 R12.1 R16.1 R18.1 R20.1 R22.1 R34.1 R35.1 R37.2 R38.2 R39.2 R40.2 R41.2 R42.2 R44.2 R45.2 R46.2 R47.2 R48.2 R49.2 R50.2 R51.2 R52.1 R53.2 REG102GA.3 REG102GA.6 TPS71715.2 U1.7 U1.15 U2.2 U2.4 | length 217.8
  Signal1 w0.15: TPS71715.2 63.75,143.35 ; 86.95,98.55 89.55,98.55 ; F4.12 95.525,97.975 ; v2(97.125,98.075) 97.6,98.55 F4.18 100.632,98.55 101.321,97.861 102.314,97.861 R44.2@103.5,96.675 ; 97.175,116.975 CaU5.7 ; v1(100.1,123.1) v1@100.1,123.525 ; Q4.4 103.4,80.175 103.5,80.075 103.5,79.025 103.65,78.875 Q4.1 105.55,78.875 ; R39.2@103.475,93.925 R39.2@103.6,93.8 ; R53.2 R53.2@103.525,95.175 ; C25.1 105.225,110.175 ; 116,95.075 Q1.1 116.7,94.475 116.95,94.225 116.95,93.35 ; v1@116.325,96.2 R18.1 ; v1(116.95,91.45) 116.95,93.35 ; Q1.4 117.125,93.175 116.95,93.35 ; v1(124.925,118.625) 125.75,117.8 P2.4 ; v1(126.2,100.675) v1@126.225,100.675 ; Q2.4 128.125,91.9 128.375,91.65 ; R10.1@127.775,99.975 R10.1 ; v1(128.475,95) v1@128.5,95.025 ; 128.55,90.6 Q2.1 ; Q3.1 129.525,100.35 129.75,100.575 130.625,100.575 130.825,100.775 ; Q3.4 130.825,100.775 ; v1(133.175,100.55) 131.05,100.55 130.825,100.775
  Signal1 w0.2: U1.15 90.9,120.725 91.875,121.7 v2(91.875,122.5) ; v1(100.1,123.1) C29.2 ; Q4.4@102.525,80.2 v1(102.525,81.725) R35.1@102.525,86.175 ; R44.2@103.5,96.675 104.675,96.675 105.125,96.225 105.125,95.475 v1(104.825,95.175) ; R53.2@103.525,95.175 104.8,95.175 105.075,94.9 105.075,94.45 104.425,93.8 R39.2@103.6,93.8 ; 108.325,80.4 R6.2 ; v1@124.925,118.6 P2.5 ; v1(126.2,100.675) 126.9,99.975 R10.1@127.775,99.975 ; v1@126.225,100.675 126.725,101.175 R12.1 ; R22.1 127.825,94.35 v1(128.475,95) ; v1(128.375,89.1) 128.375,90.775 ; v1@128.5,95.025 129.075,94.45 R20.1@129.075,93.375
  Signal1 w0.25: v1(94.675,127.25) C28.2
  Signal1 w0.254: C19.2@74.875,132.95 76.55,132.95 v1(76.55,132.975) C21.1@78.225,132.975 ; R40.2 R51.2 ; C21.1 C20.1@81.5,132.925 ; R37.2@80.85,89.475 R46.2 ; R49.2 85.175,95.425 86.825,95.425 87.325,95.925 86.65,96.6 86.625,96.6 ; R38.2 86.375,96.35 86.625,96.6 ; R48.2 C14.1 ; 86.95,98.55 86.625,98.225 86.625,96.6 ; C11.2@87.725,132.8 88.875,132.8 v1(89.925,133.85) 91.025,132.75 C13.1 ; 89.55,98.55 90.15,99.15 90.15,101.5 v2(92.925,104.275) ; C16.1 90.975,88.175 92.35,89.55 C15.1 ; U1.7 94.3,126.275 94.675,126.65 v1@94.675,127.475 ; v2(95.125,98.375) 95.525,97.975 ; 97.175,116.975 97.575,116.575 98.05,116.575 v1(98.375,116.25) ; R50.2 103.6,89.875 103.875,90.15 v1(103.875,90.525) 103.225,91.175 R45.2 ; R47.2@103.725,101.25 103.875,101.1 107.05,101.1 v1(107.675,101.725) ; R42.2@103.725,102.825 103.875,102.975 106.8,102.975 107.675,102.1 v1(107.675,101.725) ; 105.225,110.175 105.625,109.775 105.625,109.475 v1(105.575,109.425) ; 105.55,78.875 107.825,81.15 v1(107.825,81.408) ; 106,109.15 C26.2 ; R41.2@106.375,102.025 107.1,102.025 107.4,101.725 v1(107.675,101.725) ; R34.1 v1(107.825,81.408) ; 108.325,80.4 108.175,80.55 108.175,81.058 v1(107.825,81.408) ; v1(113.925,80.2) C10.1 ; R16.1@114.775,96.075 v1(116.1,96.075) ; 116,95.075 116.325,95.4 v1@116.325,96.2 ; 128.375,91.65 128.375,90.775 128.55,90.6
  Signal1 w0.3: 63.75,143.35 64.25,143.85 v1(66.375,143.85) C22.2 ; H4.3 71.32,83.675 DGND.1 ; v1@75.675,89.875 R4.1 ; REG102GA.3 v2(77.15,140.95) REG102GA.6 ; U2.2@89.925,137.975 v2(89.925,140.775) U2.4@89.925,143.675 ; v1(90.925,81.15) R8.2 ; v1@100.1,123.525 C27.2 ; R52.1 127.15,134.45 127.775,135.075 128.425,135.725 D8.2
  Signal1 w0.4: AGND.1 60,143.075 ; C23.1 v1(60.65,143.075) ; C24.1 v1(67.625,138.4) ; C18.1 106.461,138.714 v1(107.6,137.575) 108.764,138.739 C17.1
  Signal2 w0.15: C3.1@91.85,102.5 92.35,102.5 92.925,103.075
  Signal2 w0.2: C5.1 91.525,104.275 ; C4.1 v2@92.575,104.275 ; 92.925,103.075 93.5,102.5 C2.1 ; v2(95.875,104.1) 95.875,103.05 C1.1 ; v2@96.05,104.275 C6.1 ; 96.85,103.475 98.55,103.475 ; C7.1 98.8,103.225 98.55,103.475 ; C8.1 99.175,103.475 98.55,103.475
  Signal2 w0.254: 91.525,104.275 92.575,104.275 v2(92.925,104.275) 92.925,103.075
  other v1: 75.175,83.7 91.65,88.9 82.325,89.425 88.075,89.5 75.725,89.825 87.25,96 78.7,96.15 79.9,132.925 127.7,135.15
BOOT0: F4.60 P5.1 R4.2 | length 17.6
  Signal1 w0.15: 84.9,100.05 F4.60
  Signal1 w0.254: P5.1 78.275,93.125 78.3,93.15 78.3,94.55 78.775,95.025 82.325,95.025 83.325,96.025 83.325,98.475 84.9,100.05
  Signal1 w0.3: R4.2@75.725,93.125 P5.1@78.275,93.125
"CAM DCLK": F4.50 U1.10 | length 28.3
  Signal1 w0.15: 86.975,105.05 F4.50
  Signal1 w0.254: 86.975,105.05 85.925,106.1 85.925,123.725 88.875,126.675 91.35,126.675 91.6,126.425 U1.10
"CAM ENABLE": F4.54 REG102GA.1 TPS71715.3 | length 70
  Signal1 w0.15: TPS71715.3 63.1,143.75 ; 85.783,103.042 F4.54@88.217,103.042
  Signal1 w0.254: 63.1,143.75 64.325,144.975 v1(72.075,144.975) ; v1(83.75,104.025) 84.8,104.025 85.783,103.042
  Signal1 w0.3: v1(72.075,144.975) 72.075,139.975 73.1,138.95 73.1,138.15 73.35,137.9 REG102GA.1
  Signal2 w0.3: v1@72.075,144.625 72.075,124.425 82.45,114.05 82.45,105.325 v1(83.75,104.025)
"CAM EXTCLK": CaU5.5 U1.2 | length 4.3
  Signal1 w0.15: CaU5.5 98.475,119.875
  Signal1 w0.254: U1.2 97.125,121.225 98.475,119.875
"CAM EXTCLK (PWM)": CaU5.10 F4.36 | length 6.2
  Signal1 w0.15: F4.36 96.025,108.975 98.475,111.425 CaU5.10
"CAM I2C SCL": CaU5.3 U1.4 | length 6.6
  Signal1 w0.15: CaU5.3 99.775,120.4
  Signal1 w0.254: U1.4 97.15,123.025 99.775,120.4
"CAM I2C SCL (GPIO)": CaU5.12 F4.34 R32.2 | length 18.5
  Signal1 w0.15: F4.34 97.025,108.675 99.775,111.425 CaU5.12 99.775,113.8
  Signal1 w0.254: 99.775,113.8 100.35,114.375 102,114.375 102.7,113.675 R32.2
"CAM I2C SDA": CaU5.2 U1.5 | length 7.8
  Signal1 w0.15: CaU5.2 100.425,120.625
  Signal1 w0.254: U1.5 97.125,123.925 100.425,120.625
"CAM I2C SDA (GPIO)": CaU5.13 F4.33 R31.1 | length 13.4
  Signal1 w0.15: F4.33 97.525,108.575 97.85,108.9 98.325,108.9 100.425,111 CaU5.13 100.425,113.8 100.475,113.85 100.675,113.85
  Signal1 w0.254: 100.675,113.85 101.375,113.85 102.45,112.775 R31.1@105.45,112.775
"CAM RESET": CaU5.4 U1.3 | length 5.4
  Signal1 w0.15: CaU5.4 99.125,120.1
  Signal1 w0.254: U1.3 97.1,122.125 99.125,120.1
"CAM RESET (GPIO)": CaU5.11 F4.35 | length 6.3
  Signal1 w0.15: F4.35 96.525,108.8 99.125,111.4 CaU5.11
D1D: D1.2 Q1.6 | length 1.7
  Signal1 w0.15: Q1.6 D1.2
D1G: F4.20 Q1.2 R16.2 | length 19.9
  Signal1 w0.15: F4.20@99.3,99.55 100.5,99.55 101.725,98.325 ; 112.475,96.125 R16.2 ; R16.2@113.25,96.1 113.25,94.65 113.775,94.125 114.825,94.125 115.125,93.825 Q1.2
  Signal1 w0.254: 101.725,98.325 101.733,98.317 103.833,98.317 106.025,96.125 112.475,96.125
D2D: D2.2 Q1.3 | length 1.6
  Signal1 w0.15: D2.2 Q1.3
D2G: F4.21 Q1.5 R18.2 | length 27.9
  Signal1 w0.15: F4.21 100.6,100.05 101.825,98.825 102.325,98.825 ; Q1.5 118.725,93.825
  Signal1 w0.254: 102.325,98.825 104.4,98.825 105.675,97.55 118.15,97.55 118.95,96.75 R18.2 119.825,96.2 120.325,95.7 120.325,93.725 119.95,93.35 119.2,93.35 118.725,93.825
D3D: D3.2 Q2.6 | length 1.6
  Signal1 w0.15: D3.2 Q2.6
D3G: F4.23 Q2.2 R20.2 | length 40.8
  Signal1 w0.15: F4.23 100.9,101.05 102.05,99.9 ; Q2.2 130.25,91.25 130.325,91.175 130.325,90.95 130.375,90.9 131.45,90.9
  Signal1 w0.2: 128.75,96.025 130.575,94.2 R20.2
  Signal1 w0.254: 102.05,99.9 105.187,99.9 106.087,99 124.7,99 127.675,96.025 128.75,96.025 ; R20.2 130.65,93.375 131.35,93.375 131.7,93.025 131.7,91.15 131.45,90.9
D4D: D4.2 Q2.3 | length 1.6
  Signal1 w0.15: Q2.3@129.35,91.925 D4.2
D4G: F4.22 Q2.5 R22.2 | length 33.8
  Signal1 w0.15: F4.22 100.75,100.55 101.925,99.375 ; 126.325,91.7 126.325,91.375 126.45,91.25 Q2.5
  Signal1 w0.254: 101.925,99.375 104.75,99.375 105.8,98.325 122.5,98.325 126.325,94.5 R22.2 126.325,91.7
"DATA BIT 0": F4.53 U1.11 | length 28.5
  Signal1 w0.15: 86.125,103.55 F4.53
  Signal1 w0.254: v1(83.75,105.925) 86.125,103.55 ; v1(88.675,124.325) U1.11
  Signal2 w0.3: v1(83.75,105.925) 83.75,118.375 84.575,119.2 86.6,119.2 87.4,120 87.4,123.05 v1(88.675,124.325)
"DATA BIT 1": F4.43 U1.12 | length 19.2
  Signal1 w0.15: F4.43 92.525,112.1
  Signal1 w0.254: U1.12 89.375,123.425 88.05,122.1 88.05,116.575 92.525,112.1
"DATA BIT 2": F4.42 U1.13 | length 18
  Signal1 w0.15: F4.42 93.025,112.325
  Signal1 w0.254: U1.13@90.043,122.525 89.375,122.525 88.6,121.75 88.6,116.75 93.025,112.325
"DATA BIT 3": F4.41 U1.14 | length 16.8
  Signal1 w0.15: F4.41 93.525,112.65
  Signal1 w0.254: U1.14 89.4,121.625 89.25,121.475 89.25,116.925 93.525,112.65
"DATA BIT 4": F4.40 U1.17 | length 12.7
  Signal1 w0.15: F4.40 94.025,113.025
  Signal1 w0.254: U1.17 92.1,114.95 94.025,113.025
"DATA BIT 5": F4.39 U1.18 | length 12.5
  Signal1 w0.15: F4.39 94.525,113.425
  Signal1 w0.254: U1.18 93,114.95 94.525,113.425
"DATA BIT 6": F4.38 U1.19 | length 12.3
  Signal1 w0.15: F4.38 95.025,113.8
  Signal1 w0.254: U1.19 93.9,114.925 95.025,113.8
"DATA BIT 7": F4.37 U1.20 | length 12.2
  Signal1 w0.15: F4.37 95.525,114.025
  Signal1 w0.254: U1.20 94.8,114.75 95.525,114.025
"DEBUG GPIO0": F4.55 TP2.1 | length 10.4
  Signal1 w0.15: 83.25,102.55 F4.55
  Signal1 w0.254: TP2.1 81.275,104.525 83.25,102.55
"DEBUG GPIO1": F4.56 TP3.1 | length 11.8
  Signal1 w0.15: TP3.1@76.4,102.05 F4.56
  Signal1 w0.254: TP3.1@76.375,102.025 TP3.1@76.377,102.027
"DEBUG GPIO2": F4.57 TP4.1 | length 15
  Signal1 w0.15: 83.775,101.55 F4.57
  Signal1 w0.254: TP4.1@74.075,99.525 81.75,99.525 83.775,101.55
"HORIZONTAL SYNC": F4.51 U1.9 | length 31.4
  Signal1 w0.15: 86.75,104.55 F4.51
  Signal1 w0.254: 86.733,104.55 85.325,105.958 85.325,123.975 88.575,127.225 92.05,127.225 92.5,126.775 U1.9
I2C2SCL: I2C.2 R27.2 R29.2 TP11.1 | length 10.6
  Signal1 w0.254: R29.2@111.45,105 111.6,105.15 112.45,105.15 112.865,105.565 I2C.2 TP11.1@121.81,105.565
I2C2SDA: I2C.1 R26.1 R28.2 TP10.1 | length 10.6
  Signal1 w0.254: R28.2 112.275,103.575 112.825,103.025 I2C.1 TP10.1@121.8,103.025
"MCU HIBERNATE": C10.2 F4.14 R5.1 S1.1 | length 25.8
  Signal1 w0.15: 96.525,94.75 F4.14
  Signal1 w0.254: 96.525,94.75 98.675,92.6 103.917,92.6 107.867,88.65 110.5,88.65 110.9,88.25 S1.1 R5.1@113.9,86.7 ; C10.2 R5.1
"MCU ON INDICATOR D": D5.2 Q3.6 | length 1.9
  Signal1 w0.2: Q3.6 D5.2
"MCU ON INDICATOR G": F4.27 Q3.2 R10.2 | length 34.3
  Signal1 w0.15: F4.27 101,103.05 101.675,103.725 101.825,103.725 ; 130.175,98.825 Q3.2
  Signal1 w0.2: 101.825,103.725 107,103.725 110.9,99.825 125.246,99.825 126.646,98.425 R10.2
  Signal1 w0.254: R10.2 129.775,98.425 130.175,98.825
"MCU STANDBY INDICATOR D": D6.2 Q3.3 | length 1.8
  Signal1 w0.15: D6.2 Q3.3
"MCU STANDBY INDICATOR G": F4.28 Q3.5 R12.2 | length 37.8
  Signal1 w0.15: F4.28 100.9,103.55 101.55,104.2
  Signal1 w0.2: 101.55,104.2 107.2,104.2 110.725,100.675 124.6,100.675 126.6,102.675 R12.2 127.825,103.675 128.3,104.15 130.275,104.15 130.725,103.7 130.725,102.825 130.175,102.275 Q3.5
NetC9_1: C9.1 F4.31 | length 4.3
  Signal1 w0.15: F4.31 100.55,105.05 101.625,106.125 C9.1@103.175,106.125
NetC9_2: C9.2 F4.47 | length 26.9
  Signal1 w0.15: F4.47 90.525,108.85
  Signal1 w0.254: v1(87.075,111.15) 88.225,111.15 90.525,108.85 ; v1(100.65,108.65) C9.2@103,108.65
  Signal2 w0.3: v1@86.962,111.038 87.187,111.038 89.2,109.025 89.2,106.4 89.9,105.7 90.175,105.7 97.65,105.7 v1@100.625,108.675
NetC17_2: C17.2 C18.2 F1.1 P4.2 P4.4 | length 27.7
  Signal1 w0.254: C18.2@103.13,143.65 C18.2 C18.2@103.364,143.884 ; C18.2@103.414,143.634 C18.2@103.439,143.609
  Signal1 w0.4: F1.1@98.025,143.65 C18.2@103.13,143.65 ; C18.2@103.364,143.884 C17.2 113.43,145.475 120.115,145.475 P4.2 P4.4
NetC20_2: C20.2 REG102GA.5 | length 4.3
  Signal1 w0.3: REG102GA.5 79.69,136.235 C20.2
NetC23_2: C23.2 TPS71715.5 | length 2.6
  Signal1 w0.15: 62,140.225 TPS71715.5
  Signal1 w0.254: C23.2 61.7,139.925 62,140.225
NetD1_1: D1.1 R15.1 | length 1.4
  Signal1 w0.254: R15.1@121.1,93.125 D1.1
NetD2_1: D2.1 R17.1 | length 2
  Signal1 w0.254: R17.1 D2.1
NetD3_1: D3.1 R19.1 | length 1.6
  Signal1 w0.15: R19.1 D3.1
NetD4_1: D4.1 R21.1 | length 1.4
  Signal1 w0.254: R21.1 D4.1
NetD5_1: D5.1 R9.1 | length 1.5
  Signal1 w0.254: D5.1 R9.1
NetD6_1: D6.1 R11.1 | length 1.7
  Signal1 w0.254: D6.1 R11.1
NetD8_1: D8.1 R36.1 | length 1.8
  Signal1 w0.254: D8.1 D8.1@131.25,135.75
  Signal1 w0.3: D8.1@131.25,135.75 R36.1
NetF4_2: F4.2 R37.1 | length 12.7
  Signal1 w0.15: 90.525,94.975 F4.2
  Signal1 w0.254: R37.1 82.475,92.6 88.15,92.6 90.525,94.975
NetF4_3: F4.3 R46.1 | length 9.8
  Signal1 w0.15: 91.025,94.69 F4.3
  Signal1 w0.254: R46.1@84.275,91.15 85.1,91.975 88.31,91.975 91.025,94.69
NetF4_4: F4.4 R48.1 | length 8.5
  Signal1 w0.15: 91.525,94.3 F4.4
  Signal1 w0.254: R48.1 88.15,90.925 91.525,94.3
NetF4_10: F4.10 R50.1 | length 9.9
  Signal1 w0.15: F4.10 94.525,94.9 99.467,89.958
  Signal1 w0.254: 99.467,89.958 100.967,89.958 R50.1@101.025,89.9
NetF4_11: F4.11 R45.1 | length 8.8
  Signal1 w0.15: F4.11 95.025,95.025 98.9,91.15 R45.1@101,91.15
NetF4_15: F4.15 R39.1 | length 6.6
  Signal1 w0.15: 97.025,94.992 F4.15
  Signal1 w0.254: 97.025,94.992 98.117,93.9 R39.1
NetF4_16: F4.16 R53.1 | length 4.9
  Signal1 w0.15: F4.16 99.875,96.25
  Signal1 w0.254: 99.875,96.25 100.925,95.2 R53.1@101.975,95.2
NetF4_17: F4.17 R44.1 | length 3.7
  Signal1 w0.15: F4.17 100.525,98.05 100.85,97.725
  Signal1 w0.2: 100.85,97.725 100.85,97.025 101.2,96.675 R44.1@102,96.675
NetF4_24: F4.24 R47.1 | length 3
  Signal1 w0.15: F4.24 101.075,101.55
  Signal1 w0.2: 101.075,101.55 101.375,101.25
  Signal1 w0.254: 101.375,101.25 R47.1@102.225,101.25
NetF4_25: F4.25 R41.1 | length 5.5
  Signal1 w0.15: F4.25@99.327,102.048 99.329,102.05 R41.1
NetF4_26: F4.26 R42.1 | length 3
  Signal1 w0.15: F4.26 101.11,102.55 101.385,102.825
  Signal1 w0.2: 101.385,102.825 R42.1@102.225,102.825
NetF4_29: F4.29 R28.1 | length 11.3
  Signal1 w0.15: F4.29 100.775,104.05 101.425,104.7 101.6,104.7
  Signal1 w0.2: 101.6,104.7 108.125,104.7 109.25,103.575 R28.1
NetF4_30: F4.30 R29.1 | length 10.9
  Signal1 w0.15: F4.30 100.675,104.55 101.3,105.175
  Signal1 w0.2: 101.3,105.175 R29.1
NetF4_46: F4.46 H4.4 | length 52.9
  Signal1 w0.15: F4.46 91.025,109.125
  Signal1 w0.254: v1(87.1,113.05) 91.025,109.125
  Signal1 w0.3: H4.4 71.305,81.15 v1(77.45,81.15)
  Signal2 w0.3: v1(77.45,81.15) 84.004,87.704 84.004,94.337 88.202,98.535 88.202,108.177 85.65,110.729 85.65,111.6 v1(87.1,113.05)
NetF4_49: F4.49 H4.2 | length 34.2
  Signal1 w0.15: F4.49 88.225,106.225
  Signal1 w0.254: v1(87.125,107.325) 88.225,106.225
  Signal1 w0.3: H4.2 71.36,86.175 v1(75.15,86.175)
  Signal2 w0.3: v1(75.15,86.175) 76.15,86.175 83.1,93.125 83.1,94.825 87.125,98.85 v1(87.125,107.325)
NetF4_58: F4.58 R40.1 | length 12.5
  Signal1 w0.15: 84.3,101.05 F4.58
  Signal1 w0.254: R40.1 78.275,98.7 81.95,98.7 84.3,101.05
NetF4_59: F4.59 R51.1 | length 9.3
  Signal1 w0.15: 84.55,100.55 F4.59
  Signal1 w0.254: R51.1 81.55,97.55 84.55,100.55
NetF4_61: F4.61 R49.1 | length 5.1
  Signal1 w0.15: 85.2,99.55 F4.61
  Signal1 w0.254: R49.1@84.325,97.85 84.325,98.675 85.2,99.55
NetF4_62: F4.62 R38.1 | length 3.7
  Signal1 w0.15: 85.9,99.05 F4.62
  Signal1 w0.254: R38.1@85.525,97.85 85.525,98.675 85.9,99.05
NetP1_1: P1.1 R52.2 | length 5.2
  Signal1 w0.3: R52.2 P1.1
NetP1_2: "V BAT.1" P1.2 P4.1 R36.2 | length 30
  Signal1 w0.3: P1.2 130.925,141.125 131.25,140.8 R36.2
  Signal1 w0.4: v1(116.85,143.875) P4.1 ; 123.425,149.25 123.425,146.14 P1.2
  Signal2 w0.4: v1(116.85,143.875) 118.175,142.55 127.015,142.55 P1.2
NetP2_2: P2.2 R1.2 | length 18.4
  Signal1 w0.2: 125.45,115.875 125.775,116.2 P2.2
  Signal1 w0.254: R1.2 R1.2@109.225,115.875
  Signal1 w0.3: R1.2@109.225,115.875 125.45,115.875
NetP2_3: P2.3 R2.2 | length 18.4
  Signal1 w0.2: 125.4,117.375 125.775,117 P2.3
  Signal1 w0.3: R2.2 125.4,117.375
NetP5_2: P5.2 R3.1 | length 2.8
  Signal1 w0.254: P5.2 78.635,90.585 R3.1
NetR6_1: R6.1 S1.2 | length 2.3
  Signal1 w0.254: R6.1 S1.2
NetR8_1: R8.1 S2.2 | length 3
  Signal1 w0.254: R8.1 S2.2
NRST: C16.2 F4.7 H4.5 R7.1 S2.1 | length 39
  Signal1 w0.15: F4.7 93.025,94.25 95.4,91.875
  Signal1 w0.254: v1@83.385,79.615 v1(83.4,79.6) ; v1(92.15,85.15) 92.375,85.375 C16.2 ; C16.2@92.675,87.35 S2.1@95.375,87.35 ; S2.1@95.4,87.35 S2.1 ; S2.1@95.4,87.375 R7.1 95.4,91.875
  Signal1 w0.3: H4.5 v1@83.385,79.615
  Signal2 w0.3: v1(83.4,79.6) 84.35,79.6 89.9,85.15 v1(92.15,85.15)
PH0_OSC: C14.2 F4.5 Y1.1 | length 10.2
  Signal1 w0.15: 92.025,93.525 F4.5
  Signal1 w0.254: C14.2 91.275,92.425 v2(91.275,92.775) 92.025,93.525
  Signal2 w0.254: Y1.1 v2(91.275,92.775)
PH1_OSC: C15.2 F4.6 Y1.2 | length 9.4
  Signal1 w0.15: 92.525,93.475 F4.6
  Signal1 w0.254: 92.525,93.475 v2(93.225,92.775) C15.2
  Signal2 w0.254: v2(93.225,92.775) Y1.2
"USB 5V0": P2.1 P4.3 | length 36
  Signal1 w0.15: 125.775,115.4 P2.1
  Signal1 w0.254: v1(123.225,114.75) 125.125,114.75 125.775,115.4
  Signal1 w0.4: v1@116.86,141.335 P4.3
  Signal2 w0.4: v1(116.825,141.3) 123.225,134.9 v1(123.225,114.75)
"USB DATA+": F4.45 P9.2 R2.1 | length 33.2
  Signal1 w0.15: F4.45 91.525,110.302
  Signal1 w0.254: v1@87.05,117.4 v1@86.973,117.323 ; v1(87.075,117.8) 86.973,117.698 v1@86.973,117.323 ; 91.525,110.302 86.973,114.854 v1@86.973,117.323
  Signal1 w0.3: P9.2 106.115,117.885 106.625,117.375 R2.1
  Signal2 w0.3: v1(87.075,117.8) P9.2@104.015,117.8
"USB DATA-": F4.44 P9.3 R1.1 | length 29.4
  Signal1 w0.15: F4.44 92.025,111.325
  Signal1 w0.254: v1(88.05,115.3) 92.025,111.325
  Signal1 w0.3: P9.3 106.145,115.345 106.725,115.925 R1.1
  Signal2 w0.3: v1(88.05,115.3) P9.3@104.055,115.3
"VERTICAL SYNC": F4.52 U1.8 | length 34.5
  Signal1 w0.15: 86.5,104.05 F4.52
  Signal1 w0.254: 86.5,104.05 84.775,105.775 84.775,124.3 88.225,127.75 92.65,127.75 93.4,127 U1.8
VIN: C11.1 C19.1 F1.2 REG102GA.2 U2.1 VIN.1 | length 54
  Signal1 w0.3: 75.88,135.905 REG102GA.2 75.88,140.12 ; C11.1 87.6,145.275
  Signal1 w0.5: VIN.1 69.475,146.875 70.325,146.025 74.1,146.025 74.775,145.35 ; C19.1 75.88,135.905 ; 75.88,140.12 74.775,141.225 74.775,145.35 ; F1.2 95.05,145.35 94.375,146.025 88.35,146.025 87.6,145.275 86.85,146.025 75.45,146.025 74.775,145.35
W1D: P6.1 Q4.6 | length 8.2
  Signal1 w0.15: 101.4,78.875 Q4.6
  Signal1 w0.254: P6.1 99.15,81.125 101.4,78.875
W1G: F4.9 Q4.2 R34.2 | length 26.4
  Signal1 w0.15: F4.9 94.025,94.675 99.3,89.4 ; Q4.2 105.3,79.525
  Signal1 w0.254: 99.3,89.4 99.95,89.4 100.325,89.025 105.3,89.025 106.325,88 R34.2 106.325,80.55 105.3,79.525
W2D: P7.1 Q4.3 | length 4.6
  Signal1 w0.15: Q4.3 P7.1
W2G: F4.8 Q4.5 R35.2 | length 21.2
  Signal1 w0.15: F4.8 93.525,94.475 99.15,88.85 ; 101.725,79.525 Q4.5
  Signal1 w0.254: 99.15,88.85 99.625,88.85 101.05,87.425 R35.2 101.05,80.2 101.725,79.525
pads on no net: CaU5.6 CaU5.9 MT1.1 MT2.1 MT3.1 MT4.1 P2.6 P2.7 P2.8 P2.9 P2.MH1 P2.MH2

## Polygon pours and split planes (outlines as drawn)
3V3 on Power (split plane): 135.29,131.952 62,131.952 61.902,131.943 61.808,131.914 61.721,131.868 61.645,131.805 61.582,131.729 61.536,131.642 61.507,131.548 61.498,131.45 61.507,131.352 61.536,131.258 61.582,131.171 61.645,131.095 61.721,131.032 61.808,130.986 61.902,130.957 62,130.948 135.29,130.948 135.29,76.71 51.31,76.71 51.31,130.948 58,130.948 58.098,130.957 58.192,130.986 58.279,131.032 58.355,131.095 58.418,131.171 58.464,131.258 58.493,131.352 58.502,131.45 58.493,131.548 58.464,131.642 58.418,131.729 58.355,131.805 58.279,131.868 58.192,131.914 58.098,131.943 58,131.952 51.31,131.952 51.31,155.69 135.29,155.69
no net on Ground (split plane): 70.437,85.734 70.571,85.707 70.701,85.663 70.824,85.603 70.938,85.526 71.041,85.436 71.131,85.333 71.208,85.219 71.268,85.096 71.312,84.966 71.339,84.832 71.348,84.695 71.339,84.558 71.312,84.424 71.268,84.294 71.208,84.171 71.131,84.057 71.041,83.954 70.938,83.864 70.824,83.787 70.701,83.727 70.571,83.683 70.437,83.656 70.3,83.647 70.163,83.656 70.029,83.683 69.899,83.727 69.776,83.787 69.662,83.864 69.559,83.954 69.468,84.057 69.392,84.171 69.332,84.294 69.288,84.424 69.261,84.558 69.252,84.695 69.261,84.832 69.288,84.966 69.332,85.096 69.392,85.219 69.468,85.333 69.559,85.436 69.662,85.526 69.776,85.603 69.899,85.663 70.029,85.707 70.163,85.734 70.3,85.743
AGND on Ground (split plane): 135.29,131.952 62,131.952 61.902,131.943 61.808,131.914 61.721,131.868 61.645,131.805 61.582,131.729 61.536,131.642 61.507,131.548 61.498,131.45 61.507,131.352 61.536,131.258 61.582,131.171 61.645,131.095 61.721,131.032 61.808,130.986 61.902,130.957 62,130.948 135.29,130.948 135.29,76.71 51.31,76.71 51.31,130.948 58,130.948 58.098,130.957 58.192,130.986 58.279,131.032 58.355,131.095 58.418,131.171 58.464,131.258 58.493,131.352 58.502,131.45 58.493,131.548 58.464,131.642 58.418,131.729 58.355,131.805 58.279,131.868 58.192,131.914 58.098,131.943 58,131.952 51.31,131.952 51.31,155.69 135.29,155.69

## Keep-outs
Keep-Out Layer:
  lines w0.3: 52.1,77.5 134.5,77.5 134.5,154.9 52.1,154.9 52.1,77.5

## Other copper
Signal1:
  text "3V3" at 62.875,89.2 h1
  text "SWCLK" at 60.75,86.65 h1
  text "DGND" at 61.65,83.975 h1
  text "SWDIO" at 60.725,81.225 h1
  text "NRST" at 61.525,78.65 h1
Power (plane layer: these items are gaps in the copper):
  lines w0.254: 50.8,76.2 135.8,76.2 135.8,156.2 50.8,156.2 50.8,76.2
  lines w1: 51,131.45 58,131.45 ; 62,131.45 135.725,131.45
  text "Join 3V3 planes with thin trace" at 48.45,95.125 h1.52 r90
Ground (plane layer: these items are gaps in the copper):
  lines w0.1: 71.397,84.747 ccw(c70.3,84.695) 71.398,84.695
  lines w0.254: 135.2,131.425 135.29,131.515
  lines w1: 50.8,131.45 58,131.45 ; 62,131.45 135.7,131.45

## Silkscreen, mask and mechanical layers (free items; w line width, h text height)
Top Overlay:
  text "Group 3 Camera Board" at 79.45,151.05 h1.52
  text "+" at 107.275,145.925 h1
  text "+" at 129.375,136.575 h1.52 r90
  text "+" at 130.9,133.8 h1
  text "+" at 128.675,105.65 h1
  text "+" at 129.175,95.6 h1
  text "+" at 121.975,94.05 h1
  text "1" at 89.825,93.9 h1
  text "+" at 111.275,92.675 h1
  text "+" at 133.275,91.5 h1
  text "+" at 122.75,90.1 h1
Drill Drawing:
  text ".LEGEND" at 140.88,81.68 h1

## Dimensions
52.1,77.5 to 134.5,77.5 on Mechanical 1
52.1,77.5 to 52.1,154.9 on Mechanical 1

## Text inside footprints (layer, text, board x,y; h text height)
H4: Top Overlay "1" at 71.225,92.15 h1
P2: Mechanical 1 "PCB Edge" at 135.707,112.964 h1 r90
P4: Top Overlay "1" at 118.667,145.907 h1.27 r270; Top Overlay "2" at 121.207,146.415 h1.27 r270; Top Overlay "4" at 121.207,139.811 h1.27 r270; Top Overlay "3" at 118.667,139.811 h1.27 r270